# EAGLE board 25062016wearable_v1.0 (EAGLE 7.5.0)
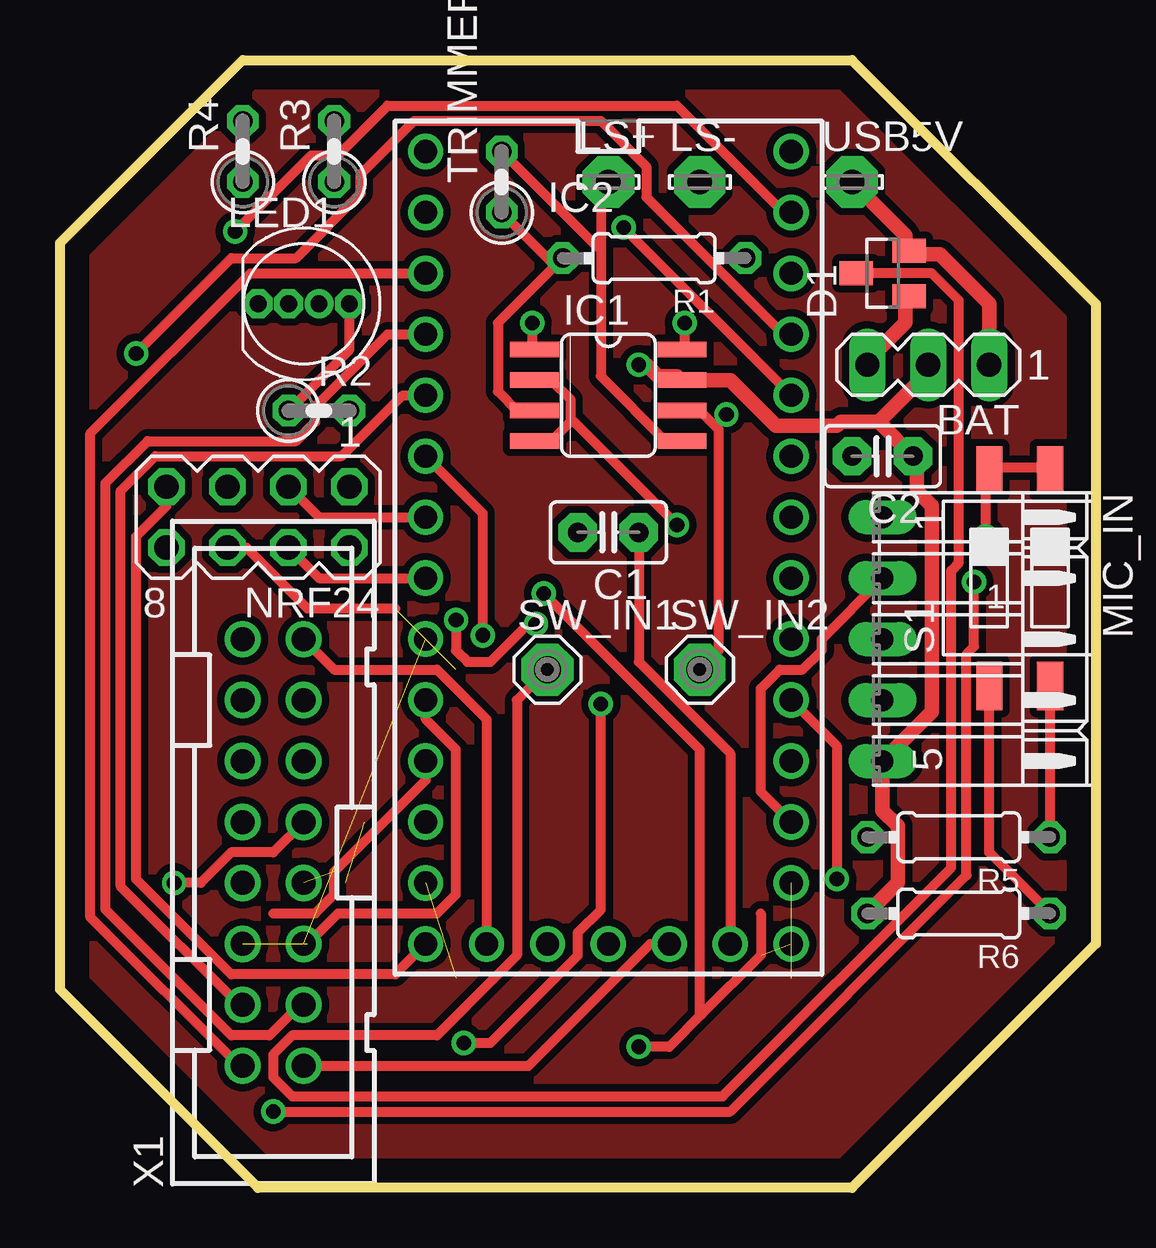
[diagram p0: board, top side]
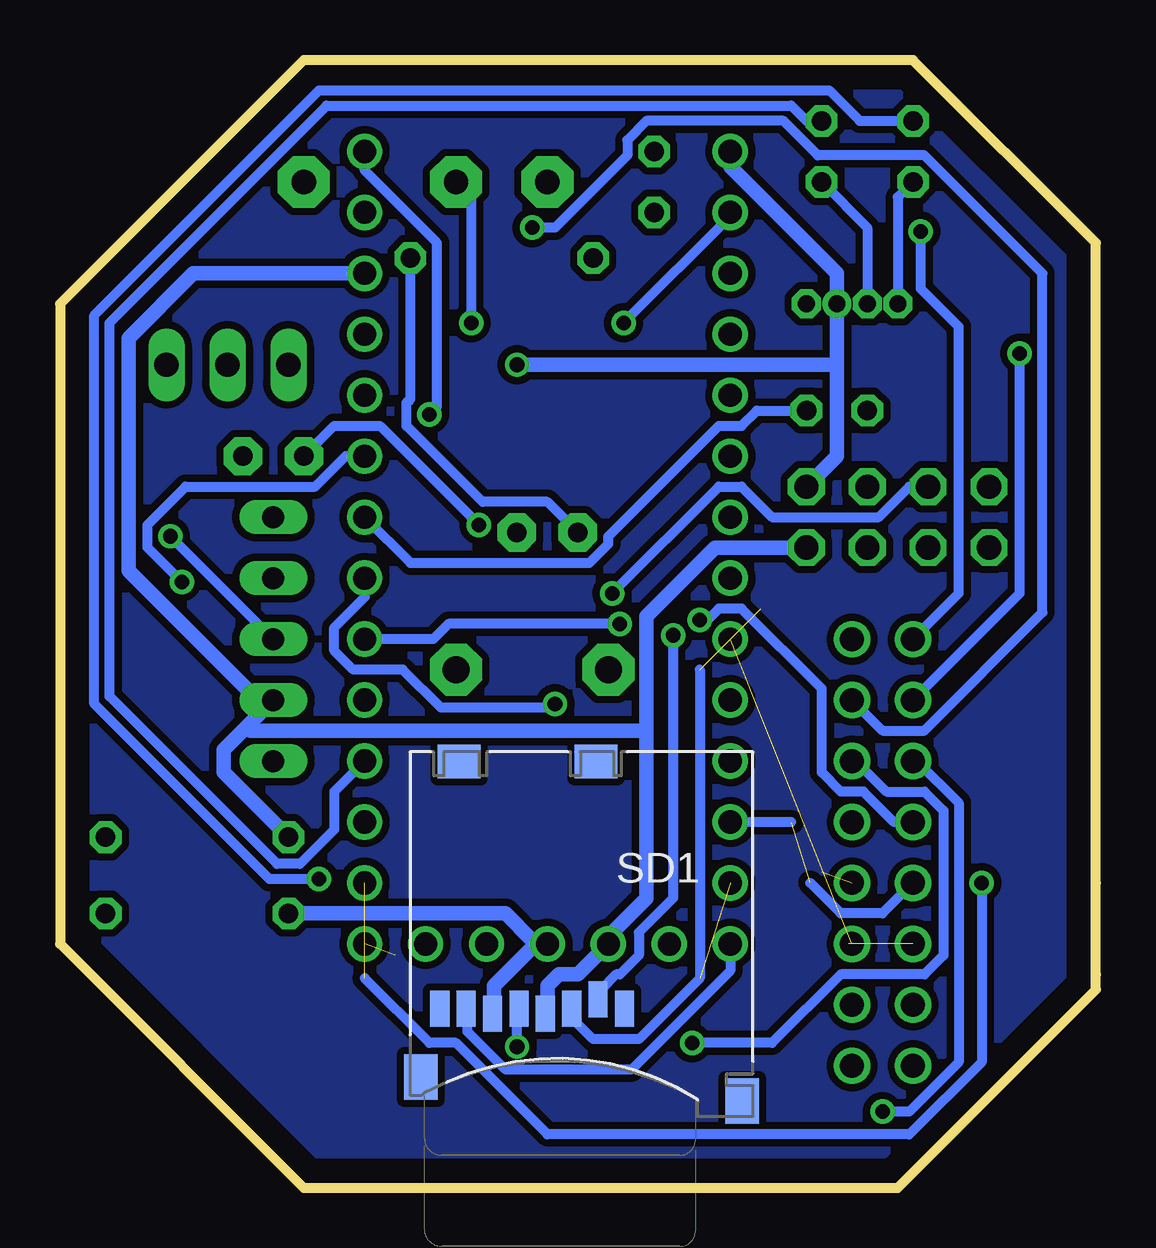
[diagram p1: board, bottom side, seen from below]

Size 43.18 x 46.99 mm. Coordinates in mm from the lower left corner, seen from the top.
Outline: 0,8.89 0,12.7 0,39.37 7.62,46.99 33.02,46.99 43.18,36.83 43.18,10.16 33.02,0 8.26,0 0,8.25 0,8.89
Copper layers (1*16): Top 0.035mm / dielectric 1.5mm / Bottom 0.035mm
Design rules "default": minimum track width 10mil, minimum drill 24mil, track to track 8mil, track to pad 8mil, pad to pad 8mil, via to via 8mil, smd to smd 8mil, copper to edge 40mil, drill to drill 8mil, minimum pad ring 10mil, minimum via ring 8mil, stop-mask expansion 4mil, vias tented up to drill 0mil, thermal gap 10mil
Net classes: 0 default: width 0.406 mm; 1 GND: width 0.61 mm; 2 3.3: width 0.61 mm

## Footprints (pad centres in the part's own frame; a part is rotated, then mirrored left to right if it is on the bottom)
MA03-1 = drill 1.016 long: 1 -2.54,0; 2 0,0; 3 2.54,0
C2.5-2 = drill 0.813 pad 1.6 octagon: 1 -1.27,0; 2 1.27,0
SOT23 = smd 1 x 1.4: 1 -0.95,-1.1; 2 0.95,-1.1; 3 0,1.1
SOIC-8 = smd 0.66 x 2.032: 1 -1.905,-3.073; 2 -0.635,-3.073; 3 0.635,-3.073; 4 1.905,-3.073; 5 1.905,3.073; 6 0.635,3.073; 7 -0.635,3.073; 8 -1.905,3.073
TEENSY3-OUTER_ROW = drill 0.965: 0 -7.62,13.97; 1 -7.62,11.43; 2 -7.62,8.89; 3 -7.62,6.35; 3.3V 7.62,11.43; 3.3V1 -2.54,-16.51; 4 -7.62,3.81; 5 -7.62,1.27; 6 -7.62,-1.27; 7 -7.62,-3.81; 8 -7.62,-6.35; 9 -7.62,-8.89; 10 -7.62,-11.43; 11 -7.62,-13.97; 12 -7.62,-16.51; 13 7.62,-16.51; 14/A0 7.62,-13.97; 15/A1 7.62,-11.43; 16/A2 7.62,-8.89; 17/A3 7.62,-6.35; 18/A4 7.62,-3.81; 19/A5 7.62,-1.27; 20/A6 7.62,1.27; 21/A7 7.62,3.81; 22/A8 7.62,6.35; 23/A9 7.62,8.89; AGND 7.62,13.97; GND -7.62,16.51; GND1 0,-16.51; PGM 2.54,-16.51; RESET/DAC 5.08,-16.51; VBAT -5.08,-16.51; VIN 7.62,16.51
LED5MMRGB = drill 0.7 pad 0.813 octagon: P$1 -1.905,0; P$2 -0.635,0; P$4 1.905,0 | drill 0.7 pad 0.813: P$3 0.635,0
LSP10 = drill 1.016 pad 2.159 octagon: MP 0,0
05PA = drill 0.914 long: 1 -5.08,0; 2 -2.54,0; 3 0,0; 4 2.54,0; 5 5.08,0
MA04-2 = drill 1.016 octagon: 1 -3.81,-1.27; 2 -3.81,1.27; 3 -1.27,-1.27; 4 -1.27,1.27; 5 1.27,-1.27; 6 1.27,1.27; 7 3.81,-1.27; 8 3.81,1.27
0204/7 = drill 0.813 octagon: 1 -3.81,0; 2 3.81,0
0207/2V = drill 0.813 octagon: 1 -1.27,0; 2 1.27,0
SMS-002 = smd 1.092 x 2.007: 1 -1.27,-4.496; 2 1.27,-4.496; 3 1.27,4.496; 4 -1.27,4.496
MICROSD_MICROSD = smd 0.8 x 1.5: 1 -1.94,2.7; 2 -0.84,2.3; 3 0.26,2.7; 4 1.36,2.9; 5 2.46,2.7; 6 3.56,2.9; 7 4.66,2.7; 8 5.76,2.7 | smd 1.4 x 1.9: NC -6.85,6.55; NC3 6.55,5.55 | smd 1.8 x 1.4: NC1 -0.75,-7.6; NC2 4.95,-7.6
SE11 = drill 1.118 pad 2.159 octagon: MP 0,0
PAK100/2500-16 = drill 1 pad 1.422: 1 -8.89,-1.27; 2 -8.89,1.27; 3 -6.35,-1.27; 4 -6.35,1.27; 5 -3.81,-1.27; 6 -3.81,1.27; 7 -1.27,-1.27; 8 -1.27,1.27; 9 1.27,-1.27; 10 1.27,1.27; 11 3.81,-1.27; 12 3.81,1.27; 13 6.35,-1.27; 14 6.35,1.27; 15 8.89,-1.27; 16 8.89,1.27

## Placement (x,y rotation side)
BAT  [MA03-1]  36.2,34.29 180 top
C1  0.1u  [C2.5-2]  22.86,27.3 180 top
C2  0.1u  [C2.5-2]  34.29,30.48 180 top
D1  BAT54C  [SOT23]  34.29,38.1 90 top
IC1  NCS2211  [SOIC-8]  22.86,33.02 270 top
IC2  TEENSY_3.1_OUTER_ROW  [TEENSY3-OUTER_ROW]  22.86,26.67 0 top
LED1  5MMRGBLED  [LED5MMRGB]  10.16,36.83 0 top
LS+  LSP10  [LSP10]  22.86,41.91 0 top
LS-  LSP10  [LSP10]  26.67,41.91 0 top
MIC_IN  [05PA]  34.29,22.86 270 top
NRF24  [MA04-2]  8.26,27.94 180 top
R1  20k  [0204/7]  24.77,38.73 180 top
R2  100  [0207/2V]  10.79,32.39 0 top
R3  100  [0207/2V]  11.43,43.18 90 top
R4  100  [0207/2V]  7.62,43.18 90 top
R5  10k  [0204/7]  37.47,14.61 180 top
R6  10k  [0204/7]  37.47,11.43 180 top
S1  SWS002  [SMS-002]  40.01,25.4 0 top
SD1  MICROSD_SF-MICROSD  [MICROSD_MICROSD]  21.59,10.16 180 bottom
SW_IN1  SE11  [SE11]  20.32,21.59 0 top
SW_IN2  SE11  [SE11]  26.67,21.59 0 top
TRIMMER20K  [0207/2V]  18.41,41.91 90 top
USB5V  LSP10  [LSP10]  33.02,41.91 0 top
X1  2516-  [PAK100/2500-16]  8.89,13.97 90 top

## Library data of the parts
BAT NRF24 = con-lstb; OC_FARNELL: unknown; OC_NEWARK: unknown
C1 C2 = capacitor-wima
D1 = diode
IC1 = NCS2211
IC2 = Teensy_3_and_LC_Series_Boards_v1.1
LED1 = led_rgb
LS+ LS- SW_IN1 SW_IN2 USB5V = solpad
MIC_IN = con-amp-quick; OC_FARNELL: unknown; OC_NEWARK: unknown
R1-R6 TRIMMER20K = rcl
S1 = smd-special
SD1 = sd
X1 = con-3m; OC_FARNELL: unknown; OC_NEWARK: unknown

## Nets
3.3 [3.3]: IC2.3.3V IC2.3.3V1 MIC_IN.4 NRF24.2 R5.2 SD1.4
5V [3.3]: BAT.1 D1.2 USB5V.MP
AGND: IC2.AGND X1.16
AR: MIC_IN.1
AUDIOEN: IC1.1 IC2.0
AUDIOIN: IC2.15/A1 MIC_IN.2
AUDIOOUT: C1.1 IC2.RESET/DAC
BLUE: IC2.16/A2 R3.2
CSN: IC2.6 NRF24.4
GAIN: MIC_IN.3 S1.3 S1.4
GND [GND]: BAT.2 C2.1 IC1.7 IC2.GND IC2.GND1 LED1.P$3 MIC_IN.5 NRF24.1 R6.2 SD1.6
GREEN: IC2.17/A3 R4.2
IRQ: NRF24.8
MISO: IC2.12 NRF24.7 SD1.7
MOSI: IC2.11 NRF24.6 SD1.3
N$1: D1.3 SW_IN1.MP
N$2: IC1.5 LS+.MP TRIMMER20K.2
N$3: IC1.3 R1.2 TRIMMER20K.1
N$4: C1.2 R1.1
N$5: C2.2 IC1.2 IC1.4
N$6: IC1.8 LS-.MP
N$7: LED1.P$4 R2.1
N$8: LED1.P$1 R4.1
N$9: LED1.P$2 R3.1
N$11: R5.1 S1.2
N$12: R6.1 S1.1
PGM: IC2.PGM X1.1
PIN1: IC2.1 X1.2
PIN2: IC2.2 X1.3
PIN3: IC2.3 X1.4
PIN7: IC2.7 X1.5
PIN8: IC2.8 X1.6
PIN9: IC2.9 X1.7
PIN10: IC2.10 X1.8
PIN14: IC2.14/A0 X1.9
PIN18: IC2.18/A4 X1.10
PIN19: IC2.19/A5 X1.11
PIN21: IC2.21/A7 X1.12
PIN22: IC2.22/A8 X1.13
PIN23: IC2.23/A9 X1.14
RED: IC2.20/A6 R2.2
RFCE: IC2.5 NRF24.3
SCK: IC2.13 NRF24.5 SD1.5
SDCE: IC2.4 SD1.2
VBAT [3.3]: BAT.3 D1.1
VBATAUX: IC2.VBAT X1.15
VCC: IC1.6 IC2.VIN SW_IN2.MP

## Tracks (layer width: path | path; a pad name or v marks a point on that pad's centre or on a via)
3.3
  Bottom 0.61: SD1.4 22.86,7.3 22.86,8.41 22.38,8.89 21.59,8.89 IC2.3.3V1 20.48,10.32 18.73,12.07 18.73,19.05 | NRF24.2 15.88,26.67 18.73,23.81 18.73,19.05 | R5.2 36.35,17.3 36.35,18.26 35.4,19.21 | 35.4,19.21 MIC_IN.4 34.77,20.16 40.32,25.72 40.32,35.4 37.62,38.1 IC2.3.3V | 18.73,19.05 35.24,19.05 35.4,19.21
5V
  Top 0.61: USB5V.MP 35.24,39.69 35.24,39.05 D1.2 35.56,38.89 36.67,38.89 38.73,36.83 BAT.1
AGND  (via drill 0.61)
  Top 0.406: IC2.AGND 30.16,40.64 25.72,45.09 13.65,45.09 11.59,43.02 10.48,43.02 v7.3,39.85
  Bottom 0.406: v7.3,39.85 7.3,37.47 5.71,35.88 5.71,24.77 X1.16
AUDIOEN  (via drill 0.61)
  Top 0.406: v19.68,36.04 19.68,34.93 IC1.1
  Bottom 0.406: v19.68,36.04 15.24,40.48 IC2.0
AUDIOIN
  Top 0.406: MIC_IN.2 31.75,22.86 31.75,22.38 30.96,21.59 30,21.59 29.21,20.8 29.21,16.51 IC2.15/A1
AUDIOOUT
  Top 0.406: IC2.RESET/DAC 27.94,18.1 24.13,21.91 C1.1
BLUE
  Bottom 0.406: R3.2 12.06,44.45 12.7,45.09 32.07,45.09 41.12,36.04 41.12,20.48 34.13,13.49 33.18,13.49 31.75,14.92 31.75,16.51 IC2.16/A2
CSN
  Top 0.406: IC2.6 10.79,25.4 NRF24.4
GAIN  (via drill 0.61)
  Top 0.406: S1.3 41.27,30 38.73,30 S1.4 38.58,29.85 v38.58,27.15
  Bottom 0.406: v38.58,27.15 MIC_IN.3
GND  (via drill 0.61)
  Top 0.61: 34.13,31.91 32.54,31.91 32.38,31.75 29.84,31.75 27.94,33.66 IC1.7 25.72,33.81 24.92,33.81 24.45,34.29 v24.13,34.29 | 34.13,31.91 C2.1 35.72,30.32 35.72,29.05 36.35,28.42 36.35,19.84 MIC_IN.5 34.29,15.72 34.92,15.08 34.92,12.7 R6.2 | BAT.2 36.2,33.97 34.13,31.91
  Bottom 0.61: 10.79,34.29 10.79,30.48 NRF24.1 | 10.79,34.29 LED1.P$3 10.79,38.1 15.24,42.55 IC2.GND | SD1.6 25.08,7.3 25.08,8.41 23.34,10.16 IC2.GND1 23.5,10.32 24.61,11.43 R6.2 | v24.13,34.29 10.79,34.29
GREEN  (via drill 0.61)
  Top 0.406: v32.38,12.86 32.38,18.41 IC2.17/A3
  Bottom 0.406: R4.2 9.84,44.45 11.11,45.72 32.38,45.72 41.75,36.35 41.75,20.16 34.45,12.86 v32.38,12.86
MISO
  Top 0.406: NRF24.7 4.45,28.42 3.17,27.15 3.17,12.86 7.14,8.89 13.97,8.89 IC2.12
  Bottom 0.406: IC2.12 15.24,9.05 19.37,4.92 24.61,4.92 26.19,6.51 26.19,7.3 SD1.7
MOSI  (2 unrouted)
  Top 0.406: NRF24.6 7.78,26.67 10.32,24.13 13.97,24.13
  Bottom 0.406: 16.51,21.59 16.51,8.73 19.05,6.19 20.95,6.19 21.75,6.99 21.75,7.3 SD1.3
N$1
  Top 0.406: D1.3 36.35,38.1 37.47,36.99 37.47,26.04 37.15,25.72 37.15,13.34 27.62,3.81 9.68,3.81 8.89,4.6 8.89,5.56 9.68,6.35 15.72,6.35 19.05,9.68 19.05,20.32 SW_IN1.MP
N$2
  Top 0.406: IC1.5 25.24,31.11 22.54,33.81 22.54,39.21 | 22.54,39.21 22.54,41.59 LS+.MP | TRIMMER20K.2 22.38,39.21 22.54,39.21
N$3
  Top 0.406: IC1.3 19.05,32.39 18.26,33.18 18.26,36.04 20.64,38.42 | 20.64,38.42 TRIMMER20K.1 | 20.64,38.42 R1.2
N$4
  Bottom 0.406: R1.1 28.57,32.86 28.73,32.7 28.73,31.75 25.56,28.57 22.86,28.57 C1.2
N$5  (via drill 0.61)
  Top 0.406: IC1.4 20.48,31.11 21.27,31.91 | 21.27,31.91 21.27,32.86 20.48,33.66 IC1.2 | v25.72,27.62 21.43,31.91 21.27,31.91
  Bottom 0.406: v25.72,27.62 29.84,31.75 31.75,31.75 C2.2
N$6  (via drill 0.61)
  Top 0.406: v26.04,36.04 26.04,34.93 IC1.8
  Bottom 0.406: v26.04,36.04 26.04,41.28 LS-.MP
N$7
  Top 0.406: LED1.P$4 12.06,34.93 R2.1
N$8
  Bottom 0.406: LED1.P$1 8.26,41.28 R4.1
N$9
  Bottom 0.406: LED1.P$2 9.53,40.01 R3.1
N$10
  pour Bottom (isolate 0.305): 0,39.37 7.62,46.99 33.02,46.99 43.18,36.83 43.18,10.16 33.02,0 8.26,0 0,8.25
N$11
  Top 0.406: R5.1 S1.2
N$12
  Top 0.406: S1.1 38.73,13.97 R6.1
N$13
  pour Top (isolate 0.305): 0,39.37 7.62,46.99 33.02,46.99 43.18,36.83 43.18,10.16 33.02,0 8.26,0 0,8.25
PGM
  Top 0.406: IC2.PGM 24.61,10.16 19.53,5.08 X1.1
PIN1
  Top 0.406: IC2.1 7.94,38.1 1.27,31.43 1.27,11.27 7.46,5.08 X1.2
PIN2
  Top 0.406: IC2.2 13.65,35.56 10.64,32.54 10.64,31.91 9.84,31.11 3.65,31.11 1.91,29.37 1.91,11.59 7.14,6.35 8.73,6.35 10,7.62 X1.3
PIN3
  Top 0.406: IC2.3 14.29,33.02 11.75,30.48 3.97,30.48 2.54,29.05 2.54,12.54 7.46,7.62 X1.4
PIN7  (1 unrouted)
PIN8  (1 unrouted)
  Top 0.406: IC2.8 15.24,19.53 16.51,18.26 16.51,12.22 15.72,11.43 11.59,11.43 10.32,10.16
PIN9  (1 unrouted)
  Top 0.406: IC2.9 15.24,16.99 11.43,13.18 11.43,12.22 10.64,11.43 8.89,11.43
PIN10  (1 unrouted)
  Bottom 0.406: 12.7,15.24 IC2.10 | 11.91,12.7 10.64,11.43 8.89,11.43 X1.8
PIN14  (via drill 0.61)  (1 unrouted)
  Top 0.406: v4.76,12.7 5.87,12.7 7.14,13.97 8.89,13.97 X1.9
  Bottom 0.406: 30.48,8.73 27.78,6.03 26.67,6.03 22.86,2.22 7.78,2.22 4.76,5.24 v4.76,12.7
PIN18  (via drill 0.61)
  Top 0.406: v19.84,23.5 19.53,23.5 17.94,21.91 16.99,21.91 16.51,22.38 v16.51,23.65
  Bottom 0.406: IC2.18/A4 27.62,22.86 26.99,23.5 v19.84,23.5 | v16.51,23.65 16.19,23.65 15.72,24.13 14.76,24.13 11.43,20.8 11.43,17.3 10.64,16.51 9.68,16.51 8.41,15.24 X1.10
PIN19  (via drill 0.61)
  Top 0.406: v22.54,20.16 22.54,11.59 21.59,10.64 21.59,9.68 17.94,6.03 v16.83,6.03
  Bottom 0.406: IC2.19/A5 30.48,24.61 31.75,23.34 31.75,22.38 30.96,21.59 28.89,21.59 27.3,20 22.7,20 v22.54,20.16 | v16.83,6.03 13.49,6.03 10.64,8.89 7.14,8.89 6.35,9.68 6.35,15.72 7.14,16.51 8.73,16.51 10,17.78 X1.11
PIN21  (via drill 0.61)
  Top 0.406: v38.1,25.24 38.1,22.54 37.78,22.22 37.78,13.02 27.94,3.17 v8.89,3.17
  Bottom 0.406: IC2.21/A7 31.27,30.48 32.54,29.21 37.94,29.21 39.53,27.62 39.53,26.67 v38.1,25.24 | v8.89,3.17 7.78,3.17 5.71,5.24 5.71,16.03 7.46,17.78 X1.12
PIN22  (via drill 0.61)
  Top 0.406: v23.5,40.01 IC2.22/A8
  Bottom 0.406: v23.5,40.01 22.54,40.01 19.53,43.02 19.53,43.66 18.73,44.45 13.02,44.45 11.59,43.02 7.14,43.02 2.22,38.1 2.22,23.97 7.14,19.05 8.89,19.05 X1.13
PIN23  (via drill 0.61)
  Top 0.406: IC2.23/A9 30.16,35.56 24.45,41.28 24.45,42.55 22.54,44.45 14.76,44.45 12.54,42.23 12.54,41.43 9.84,38.73 7.14,38.73 v3.17,34.77
  Bottom 0.406: v3.17,34.77 3.17,24.77 X1.14
RED
  Bottom 0.406: R2.2 14.13,32.39 14.76,31.75 15.72,31.75 20.32,27.15 20.32,26.83 21.11,26.04 28.57,26.04 IC2.20/A6
RFCE
  Top 0.406: IC2.5 10.79,27.94 NRF24.3
SCK  (via drill 0.61)  (1 unrouted)
  Top 0.406: v24.13,5.87 25.4,5.87 26.75,7.22 | 26.75,7.22 29.21,9.68 29.21,11.43 | v20.16,24.77 26.67,18.26 26.67,7.3 26.75,7.22
  Bottom 0.406: v24.13,5.87 24.13,7.3 SD1.5 | NRF24.5 7.78,29.21 9.05,27.94 13.49,27.94 14.76,29.21 15.72,29.21 v20.16,24.77
SDCE  (via drill 0.61)
  Top 0.406: v17.62,23.02 17.62,28.1 IC2.4
  Bottom 0.406: v17.62,23.02 17.62,12.07 19.05,10.64 19.05,9.68 19.84,8.89 20,8.89 20.64,8.25 20.64,7.94 SD1.2
VBAT
  Top 0.61: BAT.3 33.66,34.45 35.24,36.04 35.24,37.15 D1.1
VBATAUX
  Top 0.406: IC2.VBAT 17.78,19.53 15.72,21.59 11.43,21.59 X1.15
VCC  (via drill 0.61)
  Top 0.406: IC1.6 26.67,32.39 27.3,31.75 | 27.3,31.75 27.46,31.59 27.46,22.38 SW_IN2.MP | 27.3,31.75 v27.78,32.23
  Bottom 0.406: IC2.VIN 30.48,42.39 27.46,39.37 27.46,32.54 v27.78,32.23